# Altium PCB WX0.002.334PCB-4.1.PcbDoc
Units mil, origin at the board's own origin, x right, y up, seen from the top; angles counter-clockwise.
Board outline 412 x 568 mil, 2 copper layers (Top Layer, Bottom Layer); 13 components, 55 nets, 30 pads, 3 vias.
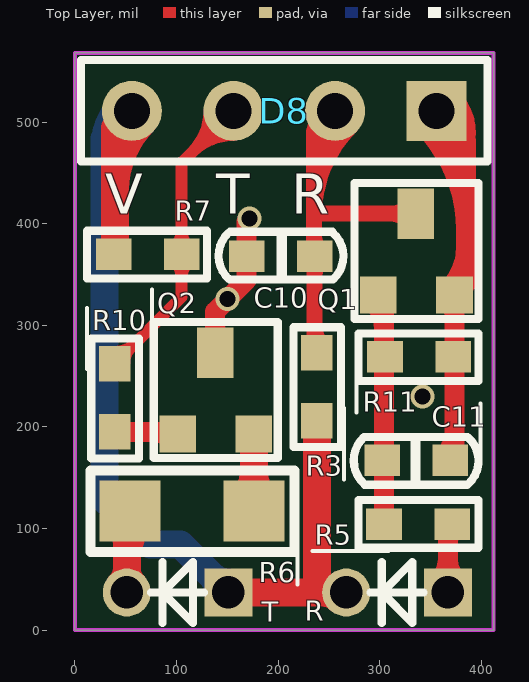
[diagram p0: Top Layer view]
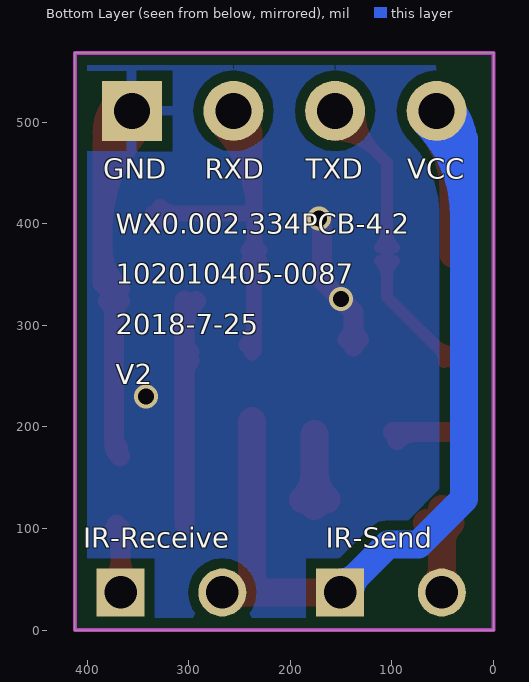
[diagram p1: Bottom Layer view, seen from below]

## Layer stack, top to bottom
Top Solder: solder mask 0.4, Solder Resist, Dk 3.5
Top Layer: signal copper 1.4
Dielectric1: dielectric 12.6, FR-4, Dk 4.8
Bottom Layer: signal copper 1.4
Bottom Solder: solder mask 0.4, Solder Resist, Dk 3.5

## Board outline
0,0 0,568 412,568 412,0

## Design rules (kind name [scope] priority, off if disabled: settings)
Clearance [All] p1: gap=10 ignorepadtopadclearanceinfootprint=FALSE except(0: Arc-Hole Track-Hole SMDPad-Hole THPad-Hole Via-Hole Fill-Hole Poly-Hole Region-Hole Text-Hole)
ComponentClearance [All] p1 off: gap=10 collisioncheckmode=3 verticalgap=10 showdistances=FALSE
PolygonConnect [All] p1: connectstyle=Relief reliefconductorwidth=10 reliefentries=4 polygonreliefangle="90 Angle" airgapwidth=10
RoutingVias [All] p1: holewidth=28 width=50 viastyle="Through Hole" minholewidth=28 minwidth=50 maxholewidth=28 maxwidth=50
SolderMaskExpansion [All] p1: expansion=4
Width [All] p1: maxlimit=196.85 minlimit=10 preferedwidth=10
29 further rules are at their usual default settings.

## Components (designator, comment, footprint, x,y, rotation, side; value= is the part's Value field where it differs from the comment)
C10 "100PF" C0603 235.49,368 r180 top
C11 "10PF" C0603 303,167 r0 top
D8 "Comment" HDR1X4 356,511 r180 top locked
Q1 "9013" SOT-23-TRAN 335.52,364.76 r0 top
Q2 "9012" SOT-23-TRAN 138,228 r0 top
R "AT405" LED-3mm 367,37 r270 top locked (schematic designator D3)
R3 "20k" R0603 238,206 r90 top
R5 "20k" R0603 371.14,104 r180 top
R6 "100" R1206 116,117 r0 top
R7 "20k" R0603 38,370 r0 top
R10 "3k" R0603 39,195 r90 top
R11 "47k" R0603 305.14,269 r0 top
T "AT205" LED-3mm 151,37 r270 top locked (schematic designator D1)

## Footprints (in the part's own frame and the unit in brackets; to place one, negate y for a bottom-side part, rotate by r counter-clockwise, add the part's x,y. Pads: shape width x height; smd on the part's side, far side on the other; paste and mask are expansions set on the pad)
C0603 [mil]
  rect 35x31 smd: 1(-0.49,0) 2(66.51,0)
  silkscreen extent -29,-24 94,23, body extent 1,-15 72,15, height 20
HDR1X4 [mm] "Connector; Header; 4 Position"
  rect 1.5x1.5 hole 0.9: 1(0,0)
  round 1.5 hole 0.9: 2(2.54,0) 3(5.08,0) 4(7.62,0)
  silkscreen extent -1.27,-1.27 8.89,1.27
LED-3mm [mm]
  rect 1.2x1.2 hole 0.813: 1(0,0)
  round 1.2 hole 0.813: 2(0,-2.54)
  silkscreen extent -0.76,-1.93 0.76,-0.61, body extent -1.65,-2.91 1.64,0.39, height 5.51
R0603 [mil]
  rect 35x31 smd: 1(0,0) 2(67,0)
  silkscreen extent -26,-24 92,23, body extent 0,-15 71,15, height 12
R1206 [mil]
  rect 60x60 smd: 1(-62,0) 2(60.05,0)
  silkscreen extent -101,-40 100,40, body extent -102,-29 91,29, height 20
SOT-23-TRAN [mil]
  rect 36x36 smd: B(-37,-35) E(38,-35)
  rect 36x50 smd: C(0,45)
  silkscreen extent -60,-59 62,75, body extent -60,-41 58,57, height 41

## Part data
C10 C11: library part CAP, "Capacitor"
Q1: library part NPN-S, "NPN Transistor"
Q2: library part PNP-S, "PNP Transistor"
R T: library part LED-5
R3 R5 R6 R7 R10 R11: library part RES

## Via types
v1: diameter 23.62, hole 15.75, Top Layer to Bottom Layer, tented both sides, 3 vias

## Nets (pads, with @x,y where several pads share a name; then routed paths per layer and width w, separated by ;. In a path a pad name is that pad's centre, name@x,y a point inside that pad or via, vN(x,y) a via of type N, cw(c..) or ccw(c..) an arc to the next point about the centre after c; other vN are vias at no path point)
5V_485: 
485A: 
485B: 
ADDR0: 
ADDR1: 
ADDR2: 
GND: C10.2 C11.2 D8.1 Q1.E Q2.C R11.2 | length 861.5
  Top Layer w19.68: Q2.C@132.23,285.77 ccw(c118.31,299.69) 138,299.69 ccw(c157.69,299.69) Q2.C@143.77,285.77 ; Q2.C@138,279 138,313.51 168.98,344.49 C10.2 168.98,401.98 v1(172,405) ; D8.1@342.08,497.08 cw(c238.46,393.46) 385,393.46 ; C11.2@367.51,171 ccw(c352.99,185.52) 373.52,185.52 ; C11.2@367.75,171.23 ccw(c356.37,184.06) 373.52,184.06 ; Q1.E@367.75,324 cw(c353.83,310.07) 373.52,310.07 cw(c393.22,310.07) Q1.E@379.29,324 ; Q1.E@367.75,335.53 ccw(c326.12,377.17) 385,377.17 ; C11.2@369.51,180.05 373.52,184.06 ; D8.1@369.92,524.92 cw(c333.51,488.51) D8.1@385,488.51 ; 385,440.99 ccw(c285.99,440.99) D8.1 385,482 385,341.24 Q1.E 373.52,184.06
  other v1: 342,230 150,326
ID: 
LED: 
LED0: 
LED1: 
LED2: 
LED3: 
LED4: 
M\C\L\R\: 
MCLR: 
NetC6_2: 
NetC11_1: 
NetC16_1: 
NetC18_2: 
NetC19_2: 
NetD1_1: 
NetD1_2: R6.1 T.2 | length 180.8
  Top Layer w27.56: R6.1@42.53,105.53 cw(c22.08,85.08) 51,85.08 ; T.2@44.04,43.96 ccw(c27.24,60.76) 51,60.76 ccw(c74.76,60.76) T.2@57.96,43.96 ; T.2 R6.1@51,119 ; 51,70.6 cw(c100.4,70.6) R6.1@65.47,105.53
NetD3_1: R5.1 R.1 | length 137.4
  Top Layer w19.68: R.1@357.26,46.74 ccw(c333.73,70.27) 367,70.27 ccw(c400.27,70.27) R.1@376.74,46.74 ; R.1 367,99.86 R5.1 ; 367,85.16 cw(c387.98,85.16) R5.1@373.14,100
NetD4_2: 
NetD6_2: 
NetD7_2: 
NetD8_2: 
NetD9_2: 
NetD10_1: 
NetQ2_B: Q2.B R10.1 | length 80.8
  Top Layer w19.68: R10.1 Q2.B@99,195 ; 76.48,195 cw(c76.48,168.48) Q2.B@95.23,187.23
NetQ2_E: Q2.E R6.2 | length 132.5
  Top Layer w27.56: R6.2@164.58,128.47 ccw(c136.89,156.16) 176.05,156.16 ccw(c215.21,156.16) R6.2@187.52,128.47 ; R6.2@176.05,122 Q2.E
NetQ3_B: 
NetQ3_C: 
NetR5_2: C11.1 Q1.B R5.2 R11.1 | length 277.5
  Top Layer w19.68: Q1.B@292.75,324 cw(c265.26,296.5) 304.14,296.5 ; R11.1@299.14,265 cw(c287.07,252.93) 304.14,252.93 ; R11.1@299.14,273 ccw(c287.07,285.07) 304.14,285.07 ; R5.2 Q1.B@304.14,324.14
PGEC3: 
PGED3: 
RXD1: 
RXD2: 
RXD3: 
RXD4: C10.1 D8.2 Q1.C R3.2 | length 659.3
  Top Layer w15.75: C10.1@230.59,362.61 cw(c217.57,349.59) 235.98,349.59 cw(c254.39,349.59) C10.1@241.37,362.61 ; C10.1@230.59,373.39 ccw(c218.75,385.23) 235.49,385.23 ; C10.1@235.49,368 235.49,490.49 D8.2 ; 235.49,387.59 ccw(c255.58,387.59) C10.1@241.37,373.39 ; 235.49,409.21 cw(c357.79,409.21) D8.2@271.31,495.69 ; 235.49,447.23 cw(c319.77,447.23) D8.2@260.18,506.82 ; 235.49,485.25 cw(c281.75,485.25) D8.2@249.04,517.96 ; 235.98,298.29 ccw(c261.29,298.29) R3.2@243.39,280.39 ; C10.1 235.98,275.02 R3.2 ; 238.25,409.76 Q1.C ; Q1.C@328.36,402.6 ccw(c311.08,385.32) 311.08,409.76 ccw(c311.08,434.21) Q1.C@328.36,416.92
SCL: 
SDA: 
SOSCI: 
SOSCO: 
TXD1: 
TXD2: 
TXD3: 
TXD4: D8.3 R7.2 R10.2 | length 496.2
  Top Layer w11.81: R10.2 105,328 R7.2 105,460 D8.3 ; R10.2@39,273.59 ccw(c39,301.59) 58.79,281.79 ; R10.2@48.59,264 cw(c66.93,264) R10.2@53.96,276.97 ; R7.2@98.22,363.22 cw(c81.84,346.84) 105,346.84 cw(c128.16,346.84) R7.2@111.78,363.22 ; R7.2@98.22,376.78 ccw(c81.84,393.16) 105,393.16 ccw(c128.16,393.16) R7.2@111.78,376.78 ; D8.3@132.38,511 cw(c75.35,511) 115.67,470.67 cw(c156,430.35) D8.3@156,487.38
USB_D+: 
USB_D-: 
VC: D8.4 R3.1 R7.1 R.2 T.1 | length 1322.7
  Top Layer w27.56: R7.1@39.42,370 39.42,494.42 D8.4 ; 39.42,432.95 cw(c134.05,432.95) D8.4@67.14,499.86 ; T.1 R.2 ; T.1@157.96,30.04 cw(c174.76,13.24) 174.76,37 cw(c174.76,60.76) T.1@157.96,43.96 ; 238,39 R3.1 ; R.2@260.04,30.04 ccw(c243.24,13.24) 243.24,37 ccw(c243.24,60.76) R.2@260.04,43.96
  Bottom Layer w27.56: 29,407.8 cw(c159.2,407.8) D8.4@67.14,499.86 ; 29,474.33 cw(c92.67,474.33) D8.4@47.65,519.35 ; D8.4 29,484 29,129 74,84 104,84 T.1 ; T.1@141.16,37 ccw(c117.4,37) 134.2,53.8 ccw(c151,70.6) T.1@151,46.84
VCAP: 
VCC: 
VIN: 

## Polygon pours and split planes (outlines as drawn)
GND on Bottom Layer "Top Layer-No Net" (solid, remove dead copper, pour order 4): 412,568 412,0 0,0 0,568 412,568

## Keep-outs
Keep-Out Layer:
  lines w3.94: 0,0 412,0 412,355 412,568 0,568 0,361 0,0

## Silkscreen, mask and mechanical layers (free items; w line width, h text height)
Top Overlay:
  lines w3.94: 12,257 12,317 ; 76,275 76,335 ; 218.97,100.55 219,45 ; 234,78 308.45,77.97 ; 265,148 265,218.55 ; 277,214 277,286.45 ; 399,163 399,223
  text "V" at 30,410 h39.37
  text "T" at 139,410 h39.37
  text "R" at 213,410 h39.37
Bottom Overlay:
  text "VCC" at 85,444 h19.68
  text "TXD" at 184.67,444 h19.68
  text "RXD" at 284.33,444 h19.68
  text "GND" at 384,444 h19.68
  text "WX0.002.334PCB-4.2" at 372,390 h19.68
  text "102010405-0087" at 372,340.67 h19.68
  text "2018-7-25" at 372,291.33 h19.68
  text "V2" at 372,242 h19.68
  text "IR-Send" at 165,81 h19.68
  text "IR-Receive" at 404,81 h19.68